# Altium PCB ZOWI_LED_Matrix.PcbDoc
Units mm, origin at the board's own origin, x right, y up, seen from the top; angles counter-clockwise.
Board outline 64 x 18 mm, 2 copper layers (Component Side, Bottom Layer), stack 1.166 mm thick; 58 components, 71 nets, 222 pads, 90 vias.
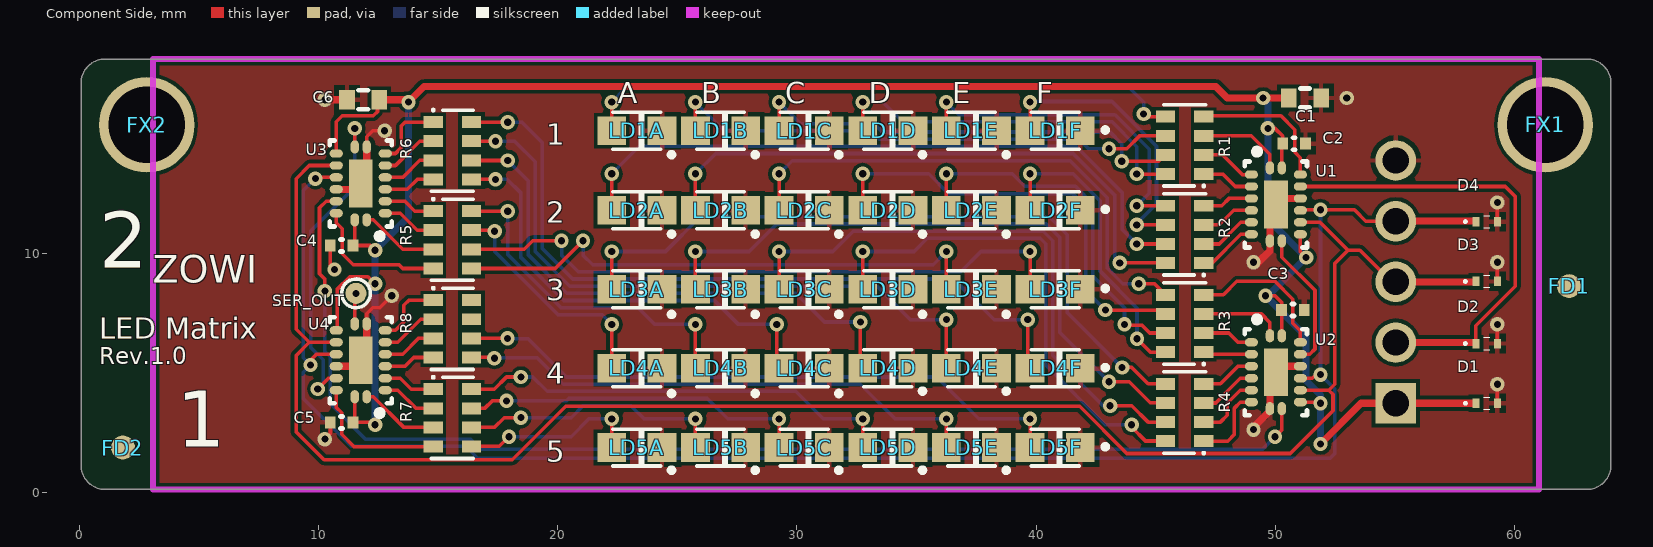
[diagram p0: Component Side view]
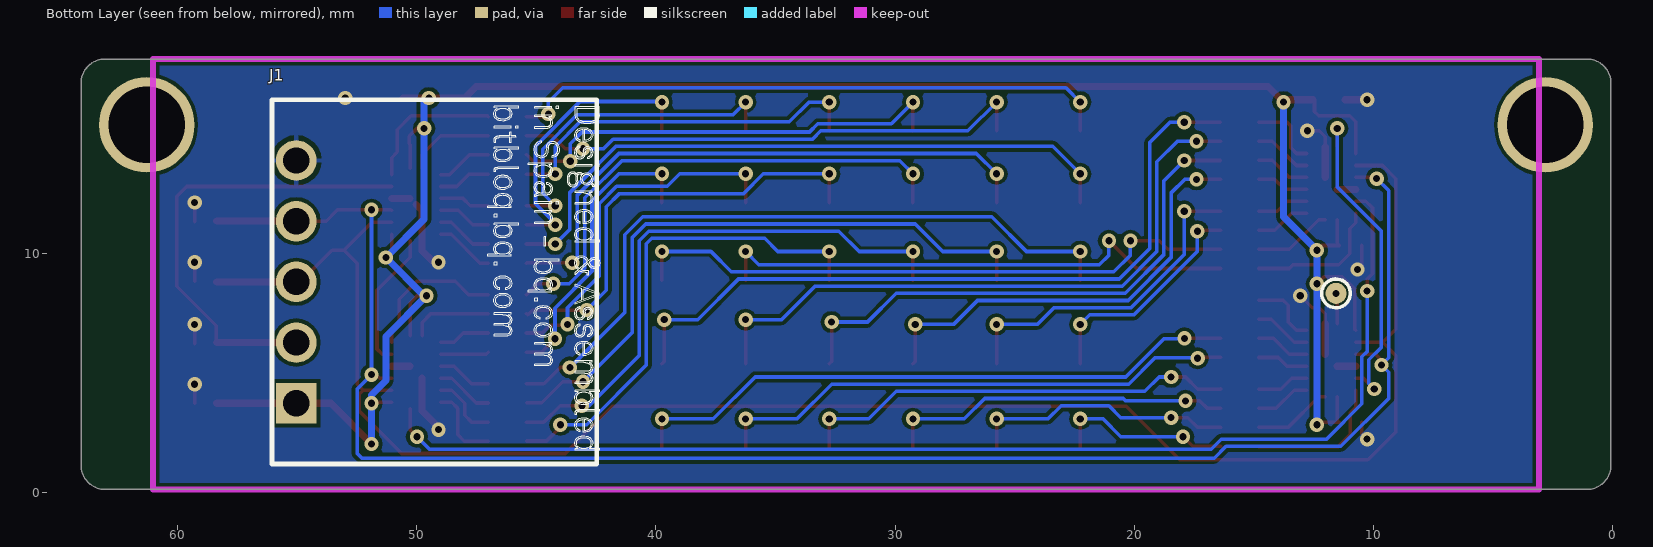
[diagram p1: Bottom Layer view, seen from below]
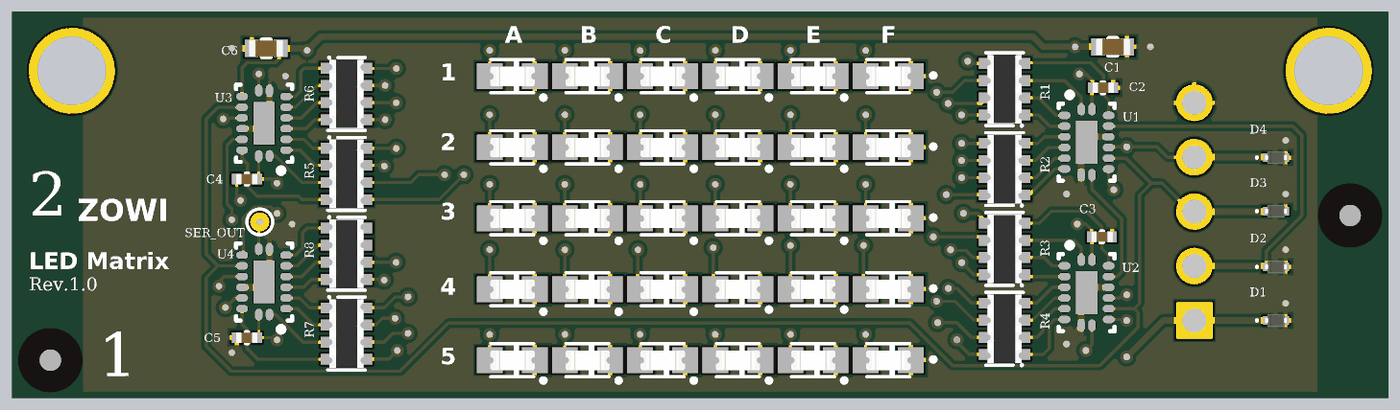
[diagram p2: 3D render of the assembled board from above, using the file's embedded part models]

## Layer stack, top to bottom
Top Solder: solder mask 0.017, Solder Resist, Dk 3.5
Component Side: signal copper 0.025
Dielectric 1: core 1.116, FR-4, Dk 4.2
Bottom Layer: signal copper 0.025
Solder Side: solder mask 0.017, Solder Resist, Dk 3.5

## Board outline
0.05,1.13 0.05,17.13 cw(c1.05,17.13) 1.05,18.13 63.05,18.13 cw(c63.05,17.13) 64.05,17.13 64.05,1.13 cw(c63.05,1.13) 63.05,0.13 1.05,0.13 cw(c1.05,1.13)

## Design rules (kind name [scope] priority, off if disabled: settings)
Clearance [All] p1: gap=0.15
MinimumSolderMaskSliver [All] p1: minsoldermaskwidth=0.08
PolygonConnect PolygonConnect_Via [All vs IsVia] p1: connectstyle=Direct reliefconductorwidth=0.254 reliefentries=4 polygonreliefangle="90 Angle" airgapwidth=0.254
PolygonConnect [All] p2: connectstyle=Relief reliefconductorwidth=0.2 reliefentries=4 polygonreliefangle="90 Angle" airgapwidth=0.2
RoutingVias [All] p1: holewidth=0.3 width=0.6 viastyle="Through Hole" minholewidth=0.3 minwidth=0.6 maxholewidth=0.5 maxwidth=0.94
SilkToSilkClearance [All] p1: silktosilkclearance=0.1
SilkToSolderMaskClearance [IsPad] p1: minsilkscreentomaskgap=0.01 clearancetoexposedcopper=TRUE
SolderMaskExpansion [All] p1: expansion=0.102
Width [All] p1: maxlimit=0.3 minlimit=0.15 preferedwidth=0.15
27 further rules are at their usual default settings.

## Components (designator, comment, footprint, x,y, rotation, side; value= is the part's Value field where it differs from the comment)
C1 "Capacitor" C0603 51.25,16.5 r180 top
C2 "Capacitor" C0402 50.796,14.59 r180 top
C3 "Capacitor" C0402 50.746,7.63 r180 top
C4 "Capacitor" C0402 10.95,10.33 r0 top
C5 "Capacitor" C0402 10.95,2.93 r0 top
C6 "Capacitor" C0603 11.85,16.43 r0 top
D1 "ESD9L5.0ST5G" SOD923 58.85,3.73 r180 top
D2 "ESD9L5.0ST5G" SOD923 58.85,6.23 r180 top
D3 "ESD9L5.0ST5G" SOD923 58.85,8.83 r180 top
D4 "ESD9L5.0ST5G" SOD923 58.85,11.33 r180 top
FD1 "Fiducial" Fiducial_1mm 62.3,8.63 r0 top
FD2 "Fiducial" Fiducial_1mm 1.8,1.88 r0 top
FX1 "Fix Hole" Fix_Hole_3.2mm 61.3,15.38 r0 top
FX2 "Fix Hole" Fix_Hole_3.2mm 2.8,15.38 r0 top
J1 "1x5 MTE Angled Header 2.54mm" "1x5 MTE Angled Header 2.54mm" 55.05,3.73 r90 bottom locked
LD1A "White" LED0805 23.3,15.13 r90 top locked
LD1B "White" LED0805 26.8,15.13 r90 top locked
LD1C "White" LED0805 30.3,15.13 r90 top locked
LD1D "White" LED0805 33.8,15.13 r90 top locked
LD1E "White" LED0805 37.3,15.13 r90 top locked
LD1F "White" LED0805 40.8,15.13 r90 top locked
LD2A "White" LED0805 23.3,11.81 r90 top locked
LD2B "White" LED0805 26.8,11.81 r90 top locked
LD2C "White" LED0805 30.3,11.81 r90 top locked
LD2D "White" LED0805 33.8,11.81 r90 top locked
LD2E "White" LED0805 37.3,11.81 r90 top locked
LD2F "White" LED0805 40.8,11.81 r90 top locked
LD3A "White" LED0805 23.3,8.5 r90 top locked
LD3B "White" LED0805 26.8,8.5 r90 top locked
LD3C "White" LED0805 30.3,8.5 r90 top locked
LD3D "White" LED0805 33.8,8.5 r90 top locked
LD3E "White" LED0805 37.3,8.5 r90 top locked
LD3F "White" LED0805 40.8,8.5 r90 top locked
LD4A "White" LED0805 23.3,5.19 r90 top locked
LD4B "White" LED0805 26.8,5.19 r90 top locked
LD4C "White" LED0805 30.3,5.19 r90 top locked
LD4D "White" LED0805 33.8,5.19 r90 top locked
LD4E "White" LED0805 37.3,5.19 r90 top locked
LD4F "White" LED0805 40.8,5.19 r90 top locked
LD5A "White" LED0805 23.3,1.88 r90 top locked
LD5B "White" LED0805 26.8,1.88 r90 top locked
LD5C "White" LED0805 30.3,1.88 r90 top locked
LD5D "White" LED0805 33.8,1.88 r90 top locked
LD5E "White" LED0805 37.3,1.88 r90 top locked
LD5F "White" LED0805 40.8,1.88 r90 top locked
R1 "Resistor_x4_Parts" 4xArray_1206 46.216,14.52 r90 top
R2 "Resistor_x4_Parts" 4xArray_1206 46.216,10.795 r90 top
R3 "Resistor_x4_Parts" 4xArray_1206 46.216,7.069 r90 top
R4 "Resistor_x4_Parts" 4xArray_1206 46.216,3.344 r90 top
R5 "Resistor_x4_Parts" 4xArray_1206 15.584,10.571 r270 top
R6 "Resistor_x4_Parts" 4xArray_1206 15.584,14.296 r270 top
R7 "Resistor_x4_Parts" 4xArray_1206 15.584,3.12 r270 top
R8 "Resistor_x4_Parts" 4xArray_1206 15.584,6.846 r270 top
SER_OUT "Testpoint" TP_POWER 11.55,8.33 r90 top
U1 "74HC595" DHVQFN16-2.5x3.5MM 50.034,12.05 r0 top
U2 "74HC595" DHVQFN16-2.5x3.5MM 50.034,5.03 r0 top
U3 "74HC595" DHVQFN16-2.5x3.5MM 11.75,12.93 r180 top
U4 "74HC595" DHVQFN16-2.5x3.5MM 11.75,5.53 r180 top

## Footprints (in the part's own frame and the unit in brackets; to place one, negate y for a bottom-side part, rotate by r counter-clockwise, add the part's x,y. Pads: shape width x height; smd on the part's side, far side on the other; paste and mask are expansions set on the pad)
"1x5 MTE Angled Header 2.54mm" [mm] "1x5 MTE Angled Header 2.54mm"
  rect 1.7x1.7 hole 1.1: 1(0,0)
  round 1.7 hole 1.1: 2(2.54,0) 3(5.08,0) 4(7.62,0) 5(10.16,0)
  silkscreen extent -2.54,-12.57 12.7,1.02, body extent -2.54,-12.57 12.7,1.02, height 7.01
4xArray_1206 [mm]
  rect 0.5x0.8 smd: 1(-1.2,-0.8) 2(-0.4,-0.8) 3(0.4,-0.8) 4(1.2,-0.8) 5(1.2,0.8) 6(0.4,0.8) 7(-0.4,0.8) 8(-1.2,0.8)
  silkscreen extent -1.75,-0.87 1.7,0.88, body extent -1.6,-0.8 1.6,0.8, height 0.57
C0402 [mm] "Chip Capacitor, Body 1.0x0.5mm, IPC High Density"
  rect 0.45x0.5 smd: 1(-0.475,0) 2(0.475,0)
  silkscreen extent -0.05,-0.25 0.05,0.25, body extent -0.51,-0.25 0.49,0.25, height 0.5
C0603 [mm] "Chip Capacitor, Body 1.6x0.8mm, IPC High Density"
  rect 0.65x0.8 smd: 1(-0.675,0) 2(0.675,0)
  silkscreen extent -0.2,-0.4 0.2,0.4, body extent -0.81,-0.4 0.79,0.4, height 0.6
DHVQFN16-2.5x3.5MM [mm] "Quad Flat Package No Leads, 16 pin, 2.5 x 3.5mm"
  oval 0.35x0.55 smd mask+0.03: 1(-0.25,1.525) 8(-0.25,-1.525) 9(0.25,-1.525) 16(0.25,1.525)
  oval 0.55x0.35 smd mask+0.03: 2(-1.025,1.25) 3(-1.025,0.75) 4(-1.025,0.25) 5(-1.025,-0.25) 6(-1.025,-0.75) 7(-1.025,-1.25) 10(1.025,-1.25) 11(1.025,-0.75) 12(1.025,-0.25) 13(1.025,0.25) 14(1.025,0.75) 15(1.025,1.25)
  rect 1x2 smd mask+0.03: 17(0,0)
  silkscreen extent -1.3,-1.8 1.3,2.33, body extent -1.3,-1.8 1.3,1.8, height 1
Fiducial_1mm [mm] "Marcas Fiduciales para montador"
  round 1 smd paste+0 mask+1: ""(0,0)
Fix_Hole_3.2mm [mm] "Fix Hole for screwing"
  round 4 hole 3.2: 1(0,0)
LED0805 [mm] "0805 2.00x1.25mm"
  rect 1.2x1.2 smd: A(0,1.05) K(0,-1.05)
  silkscreen extent -1.1,-1.55 0.77,1, body extent -0.46,-1.04 0.45,1.02, height 0.85
SOD923 [mm] "SOD923, 2-Leads, Body 0,80x0,60mm, IPC Medium Density"
  rect 0.3x0.4 smd: A(-0.45,0) K(0.45,0)
  silkscreen extent -0.13,-0.25 0.94,0.25, body extent -0.5,-0.3 0.5,0.3, height 0.4
TP_POWER [mm] "Testpoint 0.3mm"
  round 0.88 / inner round 0.74 / far side round 0.88 hole 0.3 paste-0.425: 1(0,0)
  silkscreen extent -0.6,-0.6 0.6,0.6, body extent -0.41,-0.41 0.41,0.41, height 0.1

## Part data
C1 C6: library part C0603_2.2uF_16V_±10%, "Capacitor SMD"
C2 C3 C4 C5: library part C0402_100nF_16V_±10%, "Capacitor SMD"
D1 D2 D3 D4: library part "TVS 5Vdc Low Cap", "Protection, Transient Suppression Diode"
FD1 FD2: library part "Fiducial 1mm", "Fiducial Mark"
FX1 FX2: library part FX_3.2
J1: library part CON_MTE_Angled_HDR_THT2.54_5, "Connector, 1x5 MTE Angled Header 2.54mm"
LD1A LD1B LD1C LD1D LD1E LD1F LD2A LD2B LD2C LD2D LD2E LD2F LD3A LD3B LD3C LD3D LD3E LD3F LD4A LD4B LD4C LD4D LD4E LD4F LD5A LD5B LD5C LD5D LD5E LD5F: library part LTW-170ZDC, "LED"
R1 R2 R3 R4 R5 R6 R7 R8: library part 4xArray_1206_270R_0,0625W_±0,5%, "Resistor"
SER_OUT: library part TP_POWER
U1 U2 U3 U4: library part 74HC595_QFN, "Shift Register 8BIT"

## Via types
v1: diameter 0.6, hole 0.3, Component Side to Bottom Layer, 90 vias

## Nets (pads, with @x,y where several pads share a name; then routed paths per layer and width w, separated by ;. In a path a pad name is that pad's centre, name@x,y a point inside that pad or via, vN(x,y) a via of type N, cw(c..) or ccw(c..) an arc to the next point about the centre after c; other vN are vias at no path point)
DATA: D2.K J1.2 U1.14 | length 19.3
  Component Side w0.15: U1.14 59.63,12.8 60.05,12.38 60.05,8.63 58.4,6.98 D2.K
  Component Side w0.3: J1.2 D2.K@58.38,6.27
GND: C1.1 C2.1 C3.1 C4.1 C5.1 C6.1 D1.A D2.A D3.A D4.A J1.5 LD1A.K LD1B.K LD1C.K LD1D.K LD1E.K LD1F.K LD2A.K LD2B.K LD2C.K LD2D.K LD2E.K LD2F.K LD3A.K LD3B.K LD3C.K LD3D.K LD3E.K LD3F.K LD4A.K LD4B.K LD4C.K LD4D.K LD4E.K LD4F.K LD5A.K LD5B.K LD5C.K LD5D.K LD5E.K LD5F.K U1.8 U1.13 U1.17 U2.8 U2.13 U2.17 U3.8 U3.13 U3.17 U4.8 U4.13 U4.17 | length 20.1
  Component Side w0.15: v1(10.25,2.23) 10.475,2.455 C5.1 ; C4.1 10.475,9.505 v1(10.65,9.33) ; U4.8 12,7.48 12.25,7.73 12.55,7.73 v1(13.05,8.23) ; U3.8 12,14.88 12.25,15.13 v1(12.75,15.13) ; D1.A v1(59.3,4.53) ; D2.A v1(59.3,7.03) ; D3.A v1(59.3,9.63) ; D4.A v1(59.3,12.13)
  Component Side w0.3: v1(10.25,16.43) C6.1 ; U4.13 U4.17@11.5,5.28 ; U3.13 U3.17@11.5,12.68 ; U4.17@12,5.78 U4.8 ; U3.17@12,13.18 U3.8 ; v1(49.1,2.63) 49.1,2.73 49.784,3.414 U2.8 U2.17@49.784,4.78 ; v1(49.1,9.63) 49.3,9.63 49.784,10.114 U1.8 49.784,11.8 U1.17 ; U2.17@50.284,5.28 U2.13 ; U1.17@50.284,12.3 U1.13
  other v1: 53,16.5
L1A: LD1A.A R1.5 | length 25.6
  Component Side w0.15: LD1A.A v1(22.25,16.33) ; v1(44.5,15.83) 44.5,15.93 44.71,15.72 R1.5
  Bottom Layer w0.15: v1(22.25,16.33) 22.85,16.93 43.9,16.93 44.5,16.33 v1(44.5,15.83)
L1B: LD1B.A R1.6 | length 21.9
  Component Side w0.15: LD1B.A v1(25.75,16.33) ; v1(43.05,14.38) 43.8,14.38 44.35,14.93 45.406,14.93 R1.6
  Bottom Layer w0.15: v1(25.75,16.33) 26.95,15.13 33.101,15.13 33.451,14.78 41.796,14.78 42.196,14.38 v1(43.05,14.38)
L1C: LD1C.A R1.7 | length 18.9
  Component Side w0.15: LD1C.A v1(29.25,16.33) ; v1(43.586,13.855) 45.131,13.855 45.406,14.13 R1.7
  Bottom Layer w0.15: v1(29.25,16.33) 30.15,15.43 33.226,15.43 33.576,15.08 43.092,15.08 43.586,14.587 v1(43.586,13.855)
L1D: LD1D.A R1.8 | length 15.8
  Component Side w0.15: LD1D.A v1(32.75,16.33) ; v1(44.216,13.32) R1.8
  Bottom Layer w0.15: v1(32.75,16.33) 33.6,16.33 34.425,15.505 43.176,15.505 44.216,14.465 v1(44.216,13.32)
L1E: LD1E.A R2.5 | length 14.3
  Component Side w0.15: LD1E.A v1(36.25,16.33) ; v1(44.216,11.995) R2.5
  Bottom Layer w0.15: v1(36.25,16.33) 36.775,15.805 43.301,15.805 44.741,14.365 44.741,12.52 v1(44.216,11.995)
L1F: LD1F.A R2.6 | length 12.1
  Component Side w0.15: LD1F.A v1(39.75,16.33) ; v1(44.216,11.195) R2.6
  Bottom Layer w0.15: v1(39.75,16.33) 39.775,16.355 43.175,16.355 45.041,14.489 45.041,12.077 44.216,11.252 v1(44.216,11.195)
L2A: LD2A.A R2.7 | length 27.5
  Component Side w0.15: LD2A.A@22.25,12.13 v1(22.25,13.33) ; v1(44.216,10.395) R2.7
  Bottom Layer w0.15: v1(22.25,13.33) 23.4,14.48 41.671,14.48 43.6,12.551 43.6,11.011 v1(44.216,10.395) v1@44.216,10.452
L2B: LD2B.A R2.8 | length 24.6
  Component Side w0.15: LD2B.A@25.75,12.13 v1(25.75,13.33) ; v1(43.5,9.605) 45.406,9.605 R2.8
  Bottom Layer w0.15: v1(25.75,13.33) 26.6,14.18 41.547,14.18 43.3,12.427 v1@43.3,9.605
L2C: LD2C.A R3.5 | length 21.6
  Component Side w0.15: LD2C.A@29.25,12.13 v1(29.25,13.33) ; v1(44.3,8.73) 44.955,8.73 R3.5
  Bottom Layer w0.15: v1(29.25,13.33) 29.8,13.88 41.423,13.88 42.975,12.328 42.975,9.387 43.632,8.73 v1(44.3,8.73)
L2D: LD2D.A R3.6 | length 18.4
  Component Side w0.15: LD2D.A@32.75,12.13 v1(32.75,13.33) ; v1(42.9,7.63) 45.157,7.63 45.357,7.43 45.406,7.479 R3.6
  Bottom Layer w0.15: v1(32.75,13.33) 35.508,13.33 36.333,12.505 41.525,12.505 42.075,11.955 42.075,8.455 v1(42.9,7.63)
L2E: LD2E.A R3.7 | length 15.3
  Component Side w0.15: LD2E.A@36.25,12.13 v1(36.25,13.33) ; v1(43.7,7.03) 43.736,6.994 44.436,6.994 44.761,6.669 R3.7
  Bottom Layer w0.15: v1(36.25,13.33) 39.008,13.33 39.533,12.805 41.649,12.805 42.375,12.079 42.375,9.055 43.7,7.73 v1(43.7,7.03)
L2F: LD2F.A R3.8 | length 12.4
  Component Side w0.15: LD2F.A@39.75,12.13 v1(39.75,13.33) ; v1(44.225,6.43) 44.786,5.869 R3.8
  Bottom Layer w0.15: v1(39.75,13.33) 41.549,13.33 42.675,12.204 42.675,9.263 44.225,7.713 v1(44.225,6.43)
L3A: LD3A.A R4.5 | length 29.8
  Component Side w0.15: LD3A.A@22.25,8.88 v1(22.25,10.08) ; v1(43.6,5.23) 44,5.23 44.686,4.544 R4.5
  Bottom Layer w0.15: v1(22.25,10.08) 24.5,10.08 25.95,11.53 40.55,11.53 41.3,10.78 41.3,7.53 v1(43.6,5.23)
L3B: LD3B.A R4.6 | length 26.8
  Component Side w0.15: LD3B.A@25.75,8.88 v1(25.75,10.08) ; v1(43.05,4.63) 43.9,4.63 44.776,3.754 R4.6@45.406,3.754
  Bottom Layer w0.15: v1(25.75,10.08) 28,10.08 29.15,11.23 40.426,11.23 41,10.656 41,6.68 42.925,4.755 v1@42.925,4.505
L3C: LD3C.A R4.7 | length 23.8
  Component Side w0.15: LD3C.A@29.25,8.88 v1(29.25,10.08) ; v1(43.1,3.63) 44,3.63 44.686,2.944 R4.7
  Bottom Layer w0.15: v1(29.25,10.08) 31.5,10.08 32.35,10.93 40.301,10.93 40.7,10.531 40.7,5.73 42.8,3.63 v1(43.1,3.63)
L3D: LD3D.A R4.8 | length 20.6
  Component Side w0.15: LD3D.A@32.75,8.88 v1(32.75,10.08) ; v1(44,2.83) 44,2.73 44.576,2.154 R4.8@45.406,2.154
  Bottom Layer w0.15: v1(32.75,10.08) 34.9,10.08 35.45,10.63 40.177,10.63 40.4,10.407 40.4,5.33 42.9,2.83 v1(44,2.83)
L3E: LD3E.A R5.5 | length 22.5
  Component Side w0.15: R5.5 19.891,9.371 v1(21.05,10.53) ; LD3E.A@36.25,8.88 v1(36.25,10.08)
  Bottom Layer w0.15: v1(21.05,10.53) 21.05,9.93 21.45,9.53 35.7,9.53 v1(36.25,10.08)
L3F: LD3F.A R5.6 | length 26
  Component Side w0.15: R5.6 18.591,10.171 18.95,10.53 v1(20.15,10.53) ; LD3F.A@39.75,8.88 v1(39.75,10.08)
  Bottom Layer w0.15: v1(20.15,10.53) 20.15,9.93 20.85,9.23 36.85,9.23 37.7,10.08 v1(39.75,10.08)
L4A: LD4A.A R5.7 | length 9.9
  Component Side w0.15: R5.7 v1@17.584,10.971 ; LD4A.A@22.25,5.38 v1(22.25,7.03)
  Bottom Layer w0.15: v1(17.35,10.93) 17.35,10.08 20,7.43 21.85,7.43 v1(22.25,7.03)
L4B: LD4B.A R5.8 | length 14
  Component Side w0.15: R5.8 16.394,11.761 v1(17.9,11.761) ; LD4B.A@25.75,5.38 v1(25.75,7.03)
  Bottom Layer w0.15: v1(17.9,11.761) 17.9,9.954 20.124,7.73 23.35,7.73 24.05,7.03 v1(25.75,7.03)
L4C: LD4C.A R6.5 | length 18.8
  Component Side w0.15: R6.5 v1(17.384,13.096) v1@17.584,13.096 ; v1(29.15,7.03) 29.15,5.48 LD4C.A@29.25,5.38
  Bottom Layer w0.15: v1(17.384,13.096) 17.884,13.096 18.45,12.53 18.45,9.829 20.249,8.03 26.55,8.03 27.55,7.03 v1(29.15,7.03)
L4D: LD4D.A R6.6 | length 22.7
  Component Side w0.15: R6.6@16.394,13.886 v1(17.9,13.886) ; v1(32.65,7.13) 32.65,5.48 LD4D.A@32.75,5.38
  Bottom Layer w0.15: v1(17.9,13.886) 18.75,13.036 18.75,9.953 20.373,8.33 29.95,8.33 31.15,7.13 v1(32.65,7.13)
L4E: LD4E.A R6.7 | length 27.2
  Component Side w0.15: R6.7 v1(17.384,14.696) v1@17.584,14.696 ; LD4E.A@36.25,5.38 v1(36.25,7.23)
  Bottom Layer w0.15: v1(17.384,14.696) 18.184,14.696 19.05,13.83 19.05,10.077 20.497,8.63 33.35,8.63 34.75,7.23 v1(36.25,7.23)
L4F: LD4F.A R6.8 | length 31.2
  Component Side w0.15: R6.8@16.394,15.486 v1(17.9,15.486) ; v1(39.65,7.23) 39.65,5.48 LD4F.A@39.75,5.38
  Bottom Layer w0.15: v1(17.9,15.486) 18.494,15.486 19.35,14.63 19.35,10.201 20.621,8.93 36.55,8.93 38.25,7.23 v1(39.65,7.23)
L5A: LD5A.A R7.5 | length 7.6
  Component Side w0.15: R7.5@16.374,1.93 17.55,1.93 v1(17.95,2.33) ; LD5A.A v1(22.25,3.08)
  Bottom Layer w0.15: v1(17.95,2.33) 20.55,2.33 21.3,3.08 v1(22.25,3.08)
L5B: LD5B.A R7.6 | length 11.2
  Component Side w0.15: R7.6@16.374,2.73 R7.6 17.34,2.72 17.75,3.13 v1(18.45,3.13) ; LD5B.A v1(25.75,3.08)
  Bottom Layer w0.15: v1(18.45,3.13) 20.55,3.13 21.05,3.63 23.05,3.63 23.6,3.08 v1(25.75,3.08)
L5C: LD5C.A R7.7 | length 14.6
  Component Side w0.15: R7.7@16.374,3.53 16.95,3.53 17.25,3.83 v1(17.85,3.83) ; LD5C.A v1(29.25,3.08)
  Bottom Layer w0.15: v1(17.85,3.83) 20.35,3.83 20.45,3.93 26.25,3.93 27.1,3.08 v1(29.25,3.08)
L5D: LD5D.A R7.8 | length 18.5
  Component Side w0.15: R7.8@16.374,4.33 R7.8 17.34,4.32 17.85,4.83 v1(18.45,4.83) ; LD5D.A v1(32.75,3.08)
  Bottom Layer w0.15: v1(18.45,4.83) 18.95,4.83 19.55,4.23 29.95,4.23 31.1,3.08 v1(32.75,3.08)
L5E: LD5E.A R8.5 | length 22.1
  Component Side w0.15: R8.5@16.374,5.656 v1@17.34,5.656 ; LD5E.A v1(36.25,3.08)
  Bottom Layer w0.15: v1@17.34,5.63 19.126,5.63 20.226,4.53 32.65,4.53 34.1,3.08 v1(36.25,3.08)
  other v1: 17.34,5.615
L5F: LD5F.A R8.6 | length 25.8
  Component Side w0.15: R8.6@16.374,6.456 R8.6 v1(17.89,6.446) ; LD5F.A v1(39.75,3.08)
  Bottom Layer w0.15: v1@18.05,6.43 18.75,6.43 20.35,4.83 35.85,4.83 37.6,3.08 v1(39.75,3.08)
LATCH_CLK: D4.K J1.4 U1.12 U2.12 U3.12 U4.12 | length 75.1
  Component Side w0.15: v1(9.65,5.33) 9.65,5.53 9.9,5.78 U4.12 ; v1(9.85,13.13) 9.9,13.18 U3.12 ; U2.12 51.55,4.78 51.7,4.93 v1(51.9,4.93) ; U1.12 51.089,11.83 v1(51.9,11.83) 53.32,11.83 53.8,11.35 J1.4 ; D4.K@58.38,11.35 D4.K
  Component Side w0.3: J1.4 D4.K@58.38,11.35
  Bottom Layer w0.15: v1(9.85,13.13) 9.35,12.63 9.35,5.63 v1(9.65,5.33) 9.35,5.03 9.35,3.93 11.35,1.93 16.15,1.93 16.65,1.43 52.3,1.43 52.5,1.63 52.5,4.33 v1(51.9,4.93) v1(51.9,11.83)
NetSER_OUT_1: SER_OUT.1 U4.9 | length 1.3
  Component Side w0.15: U4.9 11.5,8.28 SER_OUT.1
SERIAL_1: U1.9 U2.14 | length 5.8
  Component Side w0.15: U1.9 50.284,9.846 51.671,8.459 51.671,6.001 51.45,5.78 U2.14
SERIAL_2: U2.9 U3.14 | length 51
  Component Side w0.15: v1(10.25,8.43) 10.25,8.93 10.025,9.155 10.025,11.905 10.3,12.18 U3.14 ; v1(50,2.33) 50.284,2.614 U2.9
  Bottom Layer w0.15: v1(10.25,8.43) 10.25,5.897 10.475,5.672 10.475,3.705 11.95,2.23 16.35,2.23 16.775,1.805 49.475,1.805 v1(50,2.33)
SERIAL_3: U3.9 U4.14 | length 13.8
  Component Side w0.15: v1(9.95,4.33) 10.4,4.78 U4.14 ; U3.9 v1(11.5,15.23) v1@11.5,15.28
  Bottom Layer w0.15: v1(9.95,4.33) 10.175,4.555 10.175,5.547 9.65,6.072 9.65,10.93 11.5,12.78 v1(11.5,15.23)
SHIFT_CLK: D3.K J1.3 U1.11 U2.11 U3.11 U4.11 | length 76.9
  Component Side w0.15: U4.11 9.6,6.28 ; U3.11 9.6,13.68 9.05,13.13 9.05,6.83 9.6,6.28 ; U2.11 52.25,4.28 ; U1.11 51.88,11.3 53.05,10.13 ; J1.3@54.87,8.81 53.55,10.13 53.05,10.13 ; 9.6,6.28 9.05,5.73 9.05,2.53 10.216,1.364 18.084,1.364 20.325,3.605 41.825,3.605 43.801,1.629 50.641,1.629 52.425,3.413 52.425,4.105 52.25,4.28 ; 52.25,4.28 52.5,4.53 52.5,9.58 53.05,10.13
  Component Side w0.3: J1.3 D3.K@58.38,8.81
U1A: R1.4 U1.15 | length 6
  Component Side w0.15: R1.4 47.051,15.755 50.245,15.755 50.821,15.179 50.821,14.247 51.059,14.009 U1.15
U1B: R1.3 U1.1 | length 3.7
  Component Side w0.15: R1.3 49.01,14.92 49.784,14.146 U1.1
U1C: R1.2 U1.2 | length 2.3
  Component Side w0.15: R1.2 47.81,14.12 48.63,13.3 U1.2
U1D: R1.1 U1.3 | length 2.2
  Component Side w0.15: R1.1 47.81,13.32 48.33,12.8 U1.3
U1E: R2.4 U1.4 | length 2.1
  Component Side w0.15: R2.4 47.765,11.995 48.07,12.3 U1.4
U1F: R2.3 U1.5 | length 2.2
  Component Side w0.15: R2.3 47.665,11.195 48.27,11.8 U1.5
U1G: R2.2 U1.6 | length 2.4
  Component Side w0.15: R2.2 47.665,10.395 48.57,11.3 U1.6
U1H: R2.1 U1.7 | length 2.5
  Component Side w0.15: R2.1 47.365,9.595 48.57,10.8 U1.7
U2A: R3.4 U2.15 | length 6.2
  Component Side w0.15: R3.4 47.839,8.269 48.4,8.83 50,8.83 50.746,8.084 50.746,7.084 51.059,6.771 U2.15
U2B: R3.3 U2.1 | length 3.5
  Component Side w0.15: R3.3 49.429,7.469 49.784,7.114 U2.1
U2C: R3.2 U2.2 | length 2.2
  Component Side w0.15: R3.2 48.061,6.669 48.45,6.28 U2.2
U2D: R3.1 U2.3 | length 2
  Component Side w0.15: R3.1 47.105,5.78 U2.3
U2E: R4.4 U2.4 | length 2.3
  Component Side w0.15: R4.4 47.714,4.544 48.45,5.28 U2.4
U2F: R4.3 U2.5 | length 2.4
  Component Side w0.15: R4.3 47.514,3.744 48.55,4.78 U2.5
U2G: R4.2 U2.6 | length 2.8
  Component Side w0.15: R4.2 47.714,2.944 48,3.23 48,3.73 48.55,4.28 U2.6
U2H: R4.1 U2.7 | length 3.3
  Component Side w0.15: R4.1 48.014,2.144 48.3,2.43 48.3,3.53 48.55,3.78 U2.7
U3A: R5.4 U3.15 | length 5.9
  Component Side w0.15: U3.15 10.725,11.28 10.975,11.03 10.975,9.987 11.432,9.53 13.35,9.53 13.509,9.371 R5.4
U3B: R5.3 U3.1 | length 3.3
  Component Side w0.15: U3.1 12.275,11.405 13.509,10.171 R5.3
U3C: R5.2 U3.2 | length 2.3
  Component Side w0.15: U3.2 13.4,11.68 14.109,10.971 R5.2
U3D: R5.1 U3.3 | length 2.2
  Component Side w0.15: U3.3 13.6,12.18 14.009,11.771 R5.1
U3E: R6.4 U3.4 | length 2.2
  Component Side w0.15: U3.4 13.7,12.68 14.116,13.096 R6.4
U3F: R6.3 U3.5 | length 2.3
  Component Side w0.15: U3.5 13.5,13.18 14.216,13.896 R6.3
U3G: R6.2 U3.6 | length 2.4
  Component Side w0.15: U3.6 13.2,13.68 14.216,14.696 R6.2
U3H: R6.1 U3.7 | length 3.1
  Component Side w0.15: U3.7 13.2,14.18 13.45,14.43 13.45,15.33 13.616,15.496 R6.1
U4A: R7.4 U4.15 | length 6
  Component Side w0.15: U4.15 10.725,3.555 10.95,3.33 10.95,2.43 11.46,1.92 R7.4
U4B: R7.3 U4.1 | length 3.3
  Component Side w0.15: U4.1 12.275,4.005 13.56,2.72 R7.3
U4C: R7.2 U4.2 | length 2.3
  Component Side w0.15: U4.2 13.3,4.28 14.06,3.52 R7.2
U4D: R7.1 U4.3 | length 2.2
  Component Side w0.15: U4.3 13.4,4.78 13.86,4.32 R7.1
U4E: R8.4 U4.4 | length 2.2
  Component Side w0.15: U4.4 13.6,5.28 13.966,5.646 R8.4
U4F: R8.3 U4.5 | length 2.3
  Component Side w0.15: U4.5 13.5,5.78 14.166,6.446 R8.3
U4G: R8.2 U4.6 | length 2.4
  Component Side w0.15: U4.6 13.3,6.28 14.266,7.246 R8.2
U4H: R8.1 U4.7 | length 2.9
  Component Side w0.15: U4.7 13.2,6.78 13.55,7.13 13.55,7.83 13.766,8.046 R8.1
VCC: C1.2 C2.2 C3.2 C4.2 C5.2 C6.2 D1.K J1.1 U1.10 U1.16 U2.10 U2.16 U3.10 U3.16 U4.10 U4.16 | length 94.9
  Component Side w0.15: U4.10 10.775,6.83 10.775,8.513 11.292,9.03 12.05,9.03 v1(12.35,8.73) ; U3.10 10.725,15.505 10.975,15.755 12.275,15.755 12.45,15.93 12.45,16.355 C6.2 ; U4.16 11.5,3.005 C5.2 12.25,2.93 v1(12.35,2.83) ; U3.16 11.5,10.405 C4.2 12.15,10.33 v1(12.35,10.13) ; v1(49.6,8.23) 50,8.23 50.271,7.959 C3.2 ; v1(49.7,15.23) 50,15.23 50.321,14.909 C2.2 ; U2.16 C3.2@50.284,7.617 ; U1.16 C2.2@50.284,14.553 ; U2.10 51.85,3.78 v1(51.9,3.73) v1@51.9,3.63 ; U1.10 51.059,10.071 v1(51.3,9.83)
  Component Side w0.3: C6.2 13.65,16.43 v1(13.75,16.33) 14.4,16.98 47.52,16.98 48,16.5 v1(49.5,16.5) C1.2 ; v1@52,1.93 v1(51.9,2.03) 53.6,3.73 J1.1 D1.K@58.38,3.73
  Bottom Layer w0.3: v1(12.35,2.83) v1(12.35,10.13) 13.75,11.53 v1(13.75,16.33) ; v1@49.63,16.5 v1(49.5,16.5) 49.7,16.3 v1(49.7,15.23) 49.7,11.43 v1(51.3,9.83) 49.7,8.23 v1(49.6,8.23) 51.3,6.53 51.3,4.681 51.9,4.081 v1(51.9,3.73) v1(51.9,2.03)
pads on no net: FD1. FD2. FX1.1 FX2.1 R8.7 R8.8

## Polygon pours and split planes (outlines as drawn)
GND on Component Side "TopLayer_GND" (solid, pour order 12): 3.085,18.175 3.085,0.175 61.085,0.175 61.085,18.175
GND on Bottom Layer "BottomLayer_GND" (solid, pour order 14): 3.018,18.174 3.018,0.174 61.018,0.174 61.018,18.174

## Keep-outs
Keep-Out Layer:
  lines w0.254: 3.05,0.13 61.05,0.13 61.05,18.13 3.05,18.13 3.05,0.13

## Silkscreen, mask and mechanical layers (free items; w line width, h text height)
Top Overlay:
  text "A" at 22.5,16 h1.52
  text "B" at 26,16 h1.52
  text "C" at 29.5,16 h1.52
  text "D" at 33,16 h1.52
  text "E" at 36.5,16 h1.52
  text "F" at 40,16 h1.52
  text "1" at 19.5,14.25 h1.52
  text "2" at 19.5,11 h1.52
  text "2" at 0.8,8.63 h4
  text "ZOWI" at 3.05,8.38 h2
  text "3" at 19.5,7.75 h1.52
  text "LED Matrix" at 0.8,6.13 h1.52
  text "Rev.1.0" at 0.8,5.13 h1.2
  text "4" at 19.5,4.25 h1.52
  text "1" at 4.05,1.13 h4
  text "5" at 19.5,1 h1.52
Bottom Overlay:
  drawing of 2387 lines, arcs and shapes, not listed
Mechanical 1:
  the board outline again, w0.2
Mechanical 2:
  lines w0.2: 0.05,17.63 64.05,17.63
  lines w0.254: 32.05,0.23 32.05,18.13

## Dimensions
0.05,0.13 to 0.05,18.13 on Mechanical 1
32.05,0.23 to 64.05,0.13 on Mechanical 2
0.05,0.13 to 64.05,0.13 on Mechanical 1
63.05,18.13 to 64.05,17.63 on Mechanical 2